# EAGLE board tashtari-tashtwenty (EAGLE 6.5.0)
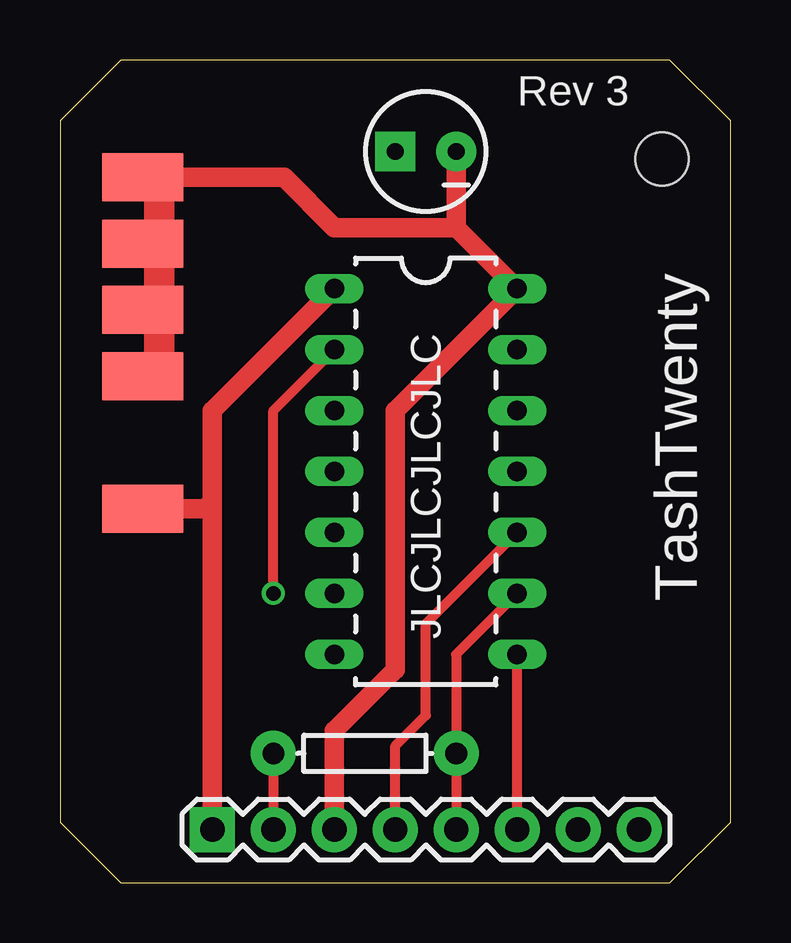
[diagram p0: board, top side]
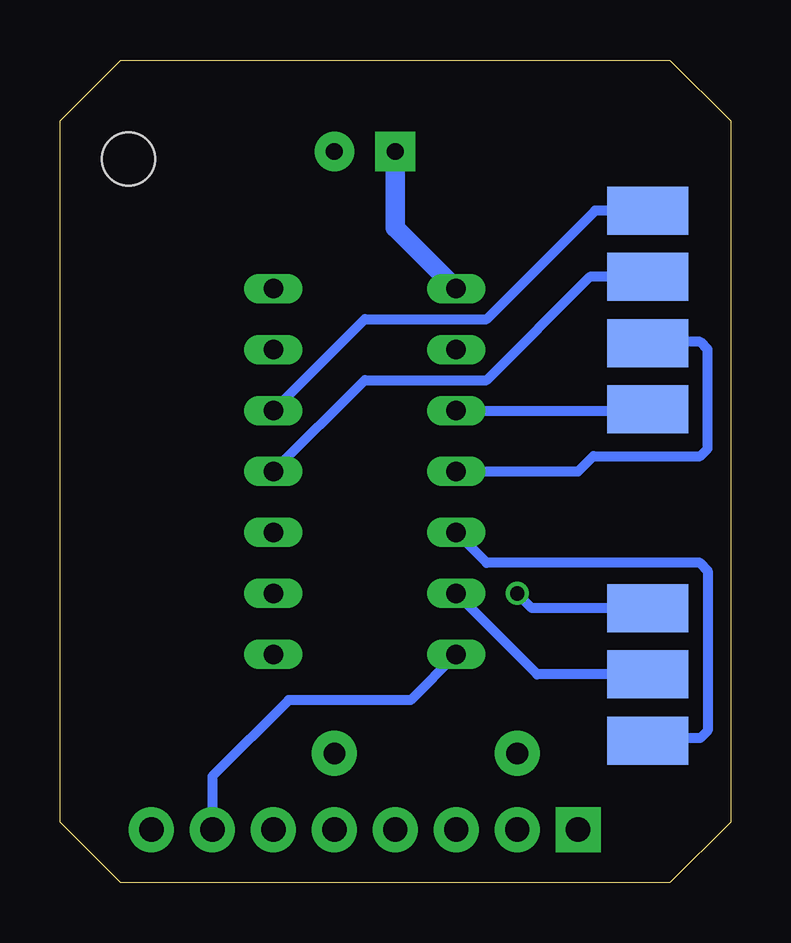
[diagram p1: board, bottom side, seen from below]

Size 27.94 x 34.29 mm. Coordinates in mm from the lower left corner, seen from the top.
Outline: 0,2.54 2.54,0 25.4,0 27.94,2.54 27.94,31.75 25.4,34.29 2.54,34.29 0,31.75 0,2.54
Copper layers (1*16): Top 0.0356mm / dielectric 1.5011mm / Bottom 0.0356mm
Design rules "LaenPCBOrder": minimum track width 6mil, minimum drill 13mil, track to track 6mil, track to pad 6mil, pad to pad 6mil, via to via 6mil, smd to smd 6mil, copper to edge 15mil, drill to drill 6mil, minimum pad ring 7mil, minimum via ring 7mil, stop-mask expansion 3mil, vias tented up to drill 0mil, thermal gap 10mil
Holes 2.2 mm at 25.08,30.16

## Footprints (pad centres in the part's own frame; a part is rotated, then mirrored left to right if it is on the bottom)
TP20SQ = smd 2 x 2: TP 0,0
DIL14 = drill 0.813 long: 1 -8.89,-3.81; 2 -6.35,-3.81; 3 -3.81,-3.81; 4 -1.27,-3.81; 5 1.27,-3.81; 6 3.81,-3.81; 7 6.35,-3.81; 8 6.35,3.81; 9 3.81,3.81; 10 1.27,3.81; 11 -1.27,3.81; 12 -3.81,3.81; 13 -6.35,3.81; 14 -8.89,3.81
1X08 = drill 1.016 pad 1.88 square: 1 0,0 | drill 1.016 pad 1.88: 2 2.54,0; 3 5.08,0; 4 7.62,0; 5 10.16,0; 6 12.7,0; 7 15.24,0; 8 17.78,0
CPOL-RADIAL-10UF-25V = drill 0.7 pad 1.651 square: 1 1.27,0 | drill 0.7 pad 1.651: 2 -1.27,0
AXIAL-0.3 = drill 0.9 pad 1.88: P$1 -3.81,0; P$2 3.81,0

## Placement (x,y rotation side)
E$3  [TP20SQ]  2.76,29.39 0 top
E$4  [TP20SQ]  4.14,29.39 0 top
E$8  [TP20SQ]  2.76,21.11 0 top
E$9  [TP20SQ]  4.14,21.11 0 top
E$10  [TP20SQ]  2.76,26.64 0 top
E$11  [TP20SQ]  4.14,26.64 0 top
E$12  [TP20SQ]  2.76,23.88 0 top
E$13  [TP20SQ]  4.14,23.88 0 top
E$14  [TP20SQ]  4.14,15.6 0 top
E$15  [TP20SQ]  2.76,15.6 0 top
E$18  [TP20SQ]  2.76,28.02 0 bottom
E$19  [TP20SQ]  4.14,28.02 0 bottom
E$21  [TP20SQ]  2.76,25.25 0 bottom
E$22  [TP20SQ]  4.14,25.25 0 bottom
E$24  [TP20SQ]  2.76,22.5 0 bottom
E$25  [TP20SQ]  4.14,22.5 0 bottom
E$27  [TP20SQ]  2.76,19.73 0 bottom
E$28  [TP20SQ]  4.14,19.73 0 bottom
E$31  [TP20SQ]  2.76,5.93 0 bottom
E$32  [TP20SQ]  4.14,5.93 0 bottom
E$33  [TP20SQ]  2.76,8.7 0 bottom
E$34  [TP20SQ]  4.14,8.7 0 bottom
E$35  [TP20SQ]  4.14,11.46 0 bottom
E$36  [TP20SQ]  2.76,11.46 0 bottom
E$37  [DIL14]  15.24,15.88 270 top
E$38  [1X08]  6.35,2.22 0 top
E$39  [CPOL-RADIAL-10UF-25V]  15.24,30.48 180 top
E$40  [AXIAL-0.3]  12.7,5.4 0 top

## Library data of the parts
E$3 E$4 E$8-E$15 E$18 E$19 E$21 E$22 E$24 E$25 E$27 E$28 E$31-E$36 = testpad
E$37 = SparkFun-DigitalIC
E$38 = SparkFun-Connectors
E$39 = SparkFun-Capacitors
E$40 = SparkFun-Resistors

## Nets
S$1: E$14.TP E$37.1 E$38.1 E$39.1
S$2: E$4.TP E$9.TP E$11.TP E$13.TP E$37.14 E$38.3 E$39.2
S$3: E$37.7 E$38.7
S$4: E$37.8 E$38.6
S$5: E$37.10 E$38.4
S$6: E$37.9 E$38.5 E$40.P$2
S$7: E$32.TP E$37.5
S$8: E$34.TP E$37.6
S$9: E$35.TP E$37.2
S$10: E$28.TP E$37.3
S$11: E$25.TP E$37.4
S$12: E$22.TP E$37.11
S$13: E$19.TP E$37.12
S$14: E$38.2 E$40.P$1

## Tracks (layer width: path | path; a pad name or v marks a point on that pad's centre or on a via)
S$1
  Top 0.813: E$14.TP 6.07,15.6 6.35,15.88 | E$38.1 6.35,15.88 | 6.35,15.88 6.35,19.68 E$37.1
  Bottom 0.813: E$39.1 13.97,27.3 E$37.1
S$2
  Top 0.813: E$4.TP 9.34,29.39 11.43,27.3 16.51,27.3 | 16.51,27.3 E$37.14 13.97,19.68 13.97,8.89 11.43,6.35 E$38.3 | 16.51,27.3 E$39.2
  Top 1.27: E$9.TP E$13.TP E$11.TP E$4.TP
S$3
  Bottom 0.406: E$37.7 13.34,7.62 18.41,7.62 21.59,4.45 E$38.7
S$4
  Top 0.406: E$38.6 E$37.8
S$5
  Top 0.406: E$38.4 13.97,5.71 15.24,6.99 15.24,10.79 E$37.10
S$6
  Top 0.406: E$37.9 16.51,9.53 E$40.P$2 E$38.5
S$7
  Bottom 0.406: E$32.TP 4.04,6.03 1.27,6.03 0.95,6.35 0.95,13.02 1.27,13.34 10.16,13.34 E$37.5
S$8
  Bottom 0.406: E$34.TP 8.06,8.7 E$37.6
S$9  (via drill 0.6)
  Top 0.406: v8.89,12.06 8.89,19.68 E$37.2
  Bottom 0.406: E$35.TP 8.28,11.46 v8.89,12.06
S$10
  Bottom 0.406: E$28.TP 4.19,19.68 E$37.3
S$11
  Bottom 0.406: 3.87,22.23 E$25.TP 4.09,22.54 1.27,22.54 0.95,22.23 0.95,18.1 1.27,17.78 5.71,17.78 6.35,17.14 E$37.4
S$12
  Bottom 0.406: E$37.11 15.24,20.95 10.16,20.95 5.86,25.25 E$22.TP
S$13
  Bottom 0.406: E$37.12 15.24,23.5 10.16,23.5 5.64,28.02 E$19.TP
S$14
  Top 0.406: E$40.P$1 E$38.2

## Text on the board
tNames: Rev 3 | TashTwenty | JLCJLCJLCJLC